# EAGLE board Pletacka-board (EAGLE 9.6.0)
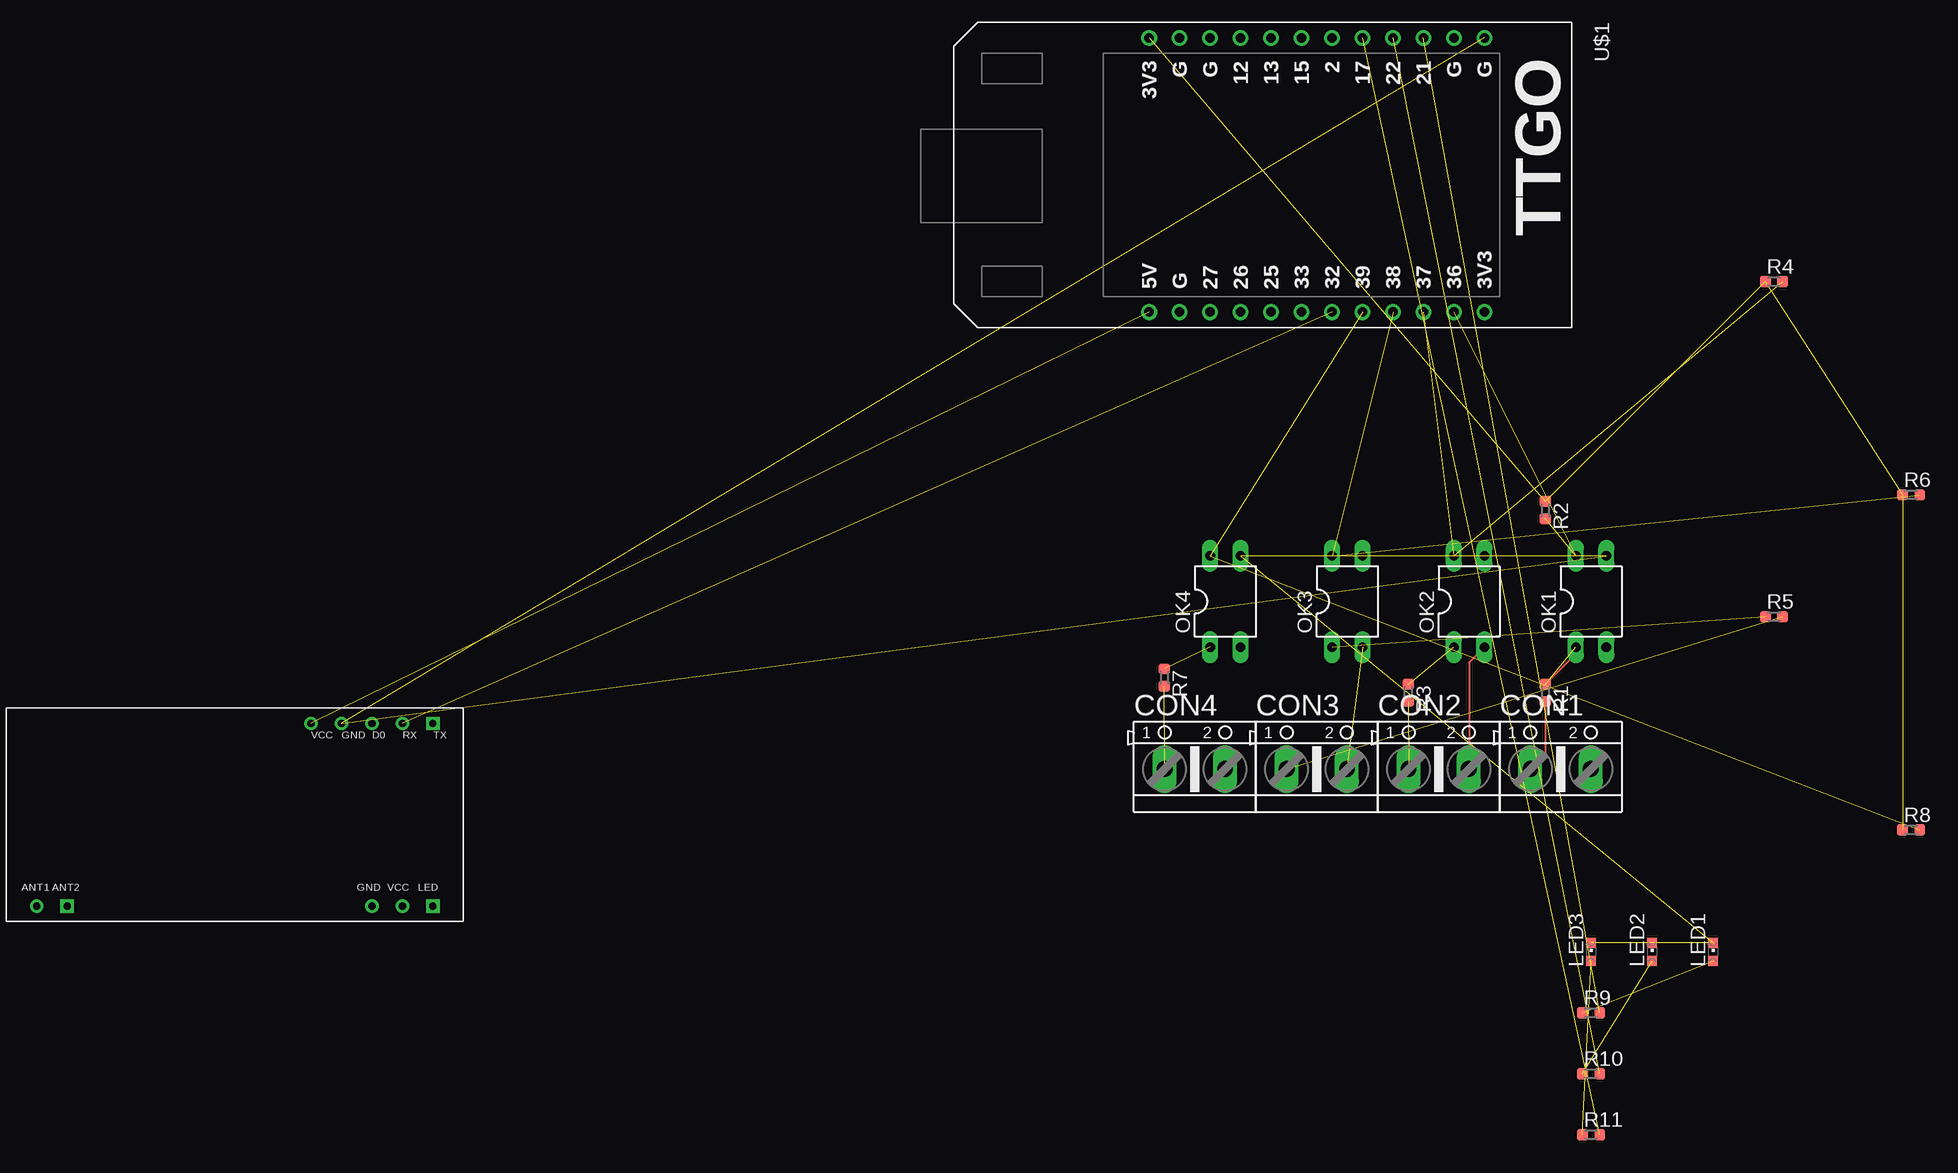
[diagram p0: board, top side]

No outline drawn. Coordinates in mm, seen from the top.
Copper layers (1*16): Top 0.035mm / dielectric 1.5mm / Bottom 0.035mm
Design rules "default": minimum track width 6mil, minimum drill 0.35mm, track to track 6mil, track to pad 6mil, pad to pad 6mil, via to via 6mil, smd to smd 6mil, copper to edge 40mil, drill to drill 6mil, minimum pad ring 10mil, minimum via ring 8mil, stop-mask expansion 4mil, vias tented up to drill 0mil, thermal gap 10mil

## Footprints (pad centres in the part's own frame; a part is rotated, then mirrored left to right if it is on the bottom)
AK500/2 = drill 1.321 long: 1 -2.515,0; 2 2.515,0
CHIPLED_0603 = smd 0.8 x 0.8: A 0,-0.75; C 0,0.75
DIL04 = drill 0.813 long: 1 -1.27,-3.81; 2 1.27,-3.81; 3 1.27,3.81; 4 -1.27,3.81
R0603 = smd 0.89 x 0.93: 1 -0.72,0; 2 0.72,0
RDM6300 = drill 0.6: ANT1 -16.51,-7.62; D0 11.43,7.62; GND 8.89,7.62; GND1 11.43,-7.62; RX 13.97,7.62; VCC 6.35,7.62; VCC1 13.97,-7.62 | drill 0.6 square: ANT2 -13.97,-7.62; LED 16.51,-7.62; TX 16.51,7.62
ESP32-T-DISPLAY = drill 0.8: 2 -11.43,16.51; 3V3 -11.43,1.27; 3V3-2 11.43,29.21; 5V 11.43,1.27; 12 -11.43,8.89; 13 -11.43,11.43; 15 -11.43,13.97; 17 -11.43,19.05; 21 -11.43,24.13; 22 -11.43,21.59; 25 11.43,11.43; 26 11.43,8.89; 27 11.43,6.35; 32 11.43,16.51; 33 11.43,13.97; 36 11.43,26.67; 37 11.43,24.13; 38 11.43,21.59; 39 11.43,19.05; G-1 -11.43,29.21; G-2 -11.43,26.67; G-3 -11.43,6.35; G-4 -11.43,3.81; G-5 11.43,3.81

## Placement (x,y rotation side)
CON1  [AK500/2]  27.94,-27.94 0 top
CON2  [AK500/2]  17.78,-27.94 0 top
CON3  [AK500/2]  7.62,-27.94 0 top
CON4  [AK500/2]  -2.54,-27.94 0 top
LED1  [CHIPLED_0603]  40.64,-43.18 0 top
LED2  [CHIPLED_0603]  35.56,-43.18 0 top
LED3  [CHIPLED_0603]  30.48,-43.18 0 top
OK1  PC817  [DIL04]  30.48,-13.97 0 top
OK2  PC817  [DIL04]  20.32,-13.97 0 top
OK3  PC817  [DIL04]  10.16,-13.97 0 top
OK4  PC817  [DIL04]  0,-13.97 0 top
R1  1K  [R0603]  26.67,-21.59 270 top
R2  4K7  [R0603]  26.67,-6.35 270 top
R3  1K  [R0603]  15.24,-21.59 270 top
R4  4K7  [R0603]  45.72,12.7 0 top
R5  1K  [R0603]  45.72,-15.24 0 top
R6  4K7  [R0603]  57.15,-5.08 0 top
R7  1K  [R0603]  -5.08,-20.32 270 top
R8  4K7  [R0603]  57.15,-33.02 0 top
R9  330R  [R0603]  30.48,-48.26 0 top
R10  330R  [R0603]  30.48,-53.34 0 top
R11  330R  [R0603]  30.48,-58.42 0 top
RDM1  RDM6300  [RDM6300]  -82.55,-31.75 0 top
U$1  ESP-32-T-DISPLAY  [ESP32-T-DISPLAY]  -7.62,21.59 270 top

## Library data of the parts
CON1-CON4 = #Svorkovnice
LED1-LED3 = led
OK1-OK4 = #Optocleny
R1-R11 = rcl_upravena
RDM1 = RDM6300; AVAILABILITY: Unavailable; DESCRIPTION: RDM6300 125KHz cardreader mini-module is designed for reading code from 125KHz card compatible read-only tags and read/write card.; MF: ITEAD; MP: RDM6300; PACKAGE: Package; PRICE: None
U$1 = ESP32-T-Display

## Nets
+3V3: R2.1 R4.1 R6.1 R8.1 U$1.3V3
+5V: RDM1.VCC U$1.5V
BUTTON1: U$1.12
GND: LED1.C LED2.C LED3.C OK1.3 OK2.3 OK3.3 OK4.3 RDM1.GND U$1.G-1
GPIO2: U$1.2
GPIO13: U$1.13
GPIO15: U$1.15
GPIO25: U$1.25
GPIO26: U$1.26
GPIO27: U$1.27
GPIO33: U$1.33
LED_POWER: R9.2 U$1.21
LED_SEND: R11.2 U$1.17
LED_WIFI: R10.2 U$1.22
N$1: OK1.1 R1.1
N$3: CON2.2 OK2.2
N$4: CON1.1 R1.2
N$5: OK2.1 R3.1
N$6: CON2.1 R3.2
N$7: CON3.2 OK3.2
N$8: OK3.1 R5.1
N$9: CON3.1 R5.2
N$11: OK4.1 R7.1
N$12: CON4.1 R7.2
N$13: LED1.A R9.1
N$14: LED2.A R10.1
N$15: LED3.A R11.1
OPTO1: OK1.4 R2.2 U$1.36
OPTO2: OK2.4 R4.2 U$1.37
OPTO3: OK3.4 R6.2 U$1.38
OPTO4: OK4.4 R8.2 U$1.39
RFID: RDM1.RX U$1.32

## Tracks (layer width: path | path; a pad name or v marks a point on that pad's centre or on a via)
+3V3  (4 unrouted)
+5V  (1 unrouted)
GND  (8 unrouted)
LED_POWER  (1 unrouted)
LED_SEND  (1 unrouted)
LED_WIFI  (1 unrouted)
N$1  (1 unrouted)
  Top 0.152: OK1.1 29.21,-18.33 R1.1
N$3  (1 unrouted)
  Top 0.152: OK2.2 20.32,-19.05 20.32,-27.94
N$4
  Top 0.152: R1.2 26.67,-26.7 CON1.1
N$5  (1 unrouted)
N$6  (1 unrouted)
N$7  (1 unrouted)
N$8  (1 unrouted)
N$9  (1 unrouted)
N$11  (1 unrouted)
N$12  (1 unrouted)
N$13  (1 unrouted)
N$14  (1 unrouted)
N$15  (1 unrouted)
OPTO1  (2 unrouted)
OPTO2  (2 unrouted)
OPTO3  (2 unrouted)
OPTO4  (2 unrouted)
RFID  (1 unrouted)